# Altium PCB team back ECU.PcbDoc
Units mil, origin at the board's own origin, x right, y up, seen from the top; angles counter-clockwise.
Board outline 2850 x 2555.03 mil, 2 copper layers (Top, Bottom); 12 components, 18 nets, 110 pads, 0 vias.
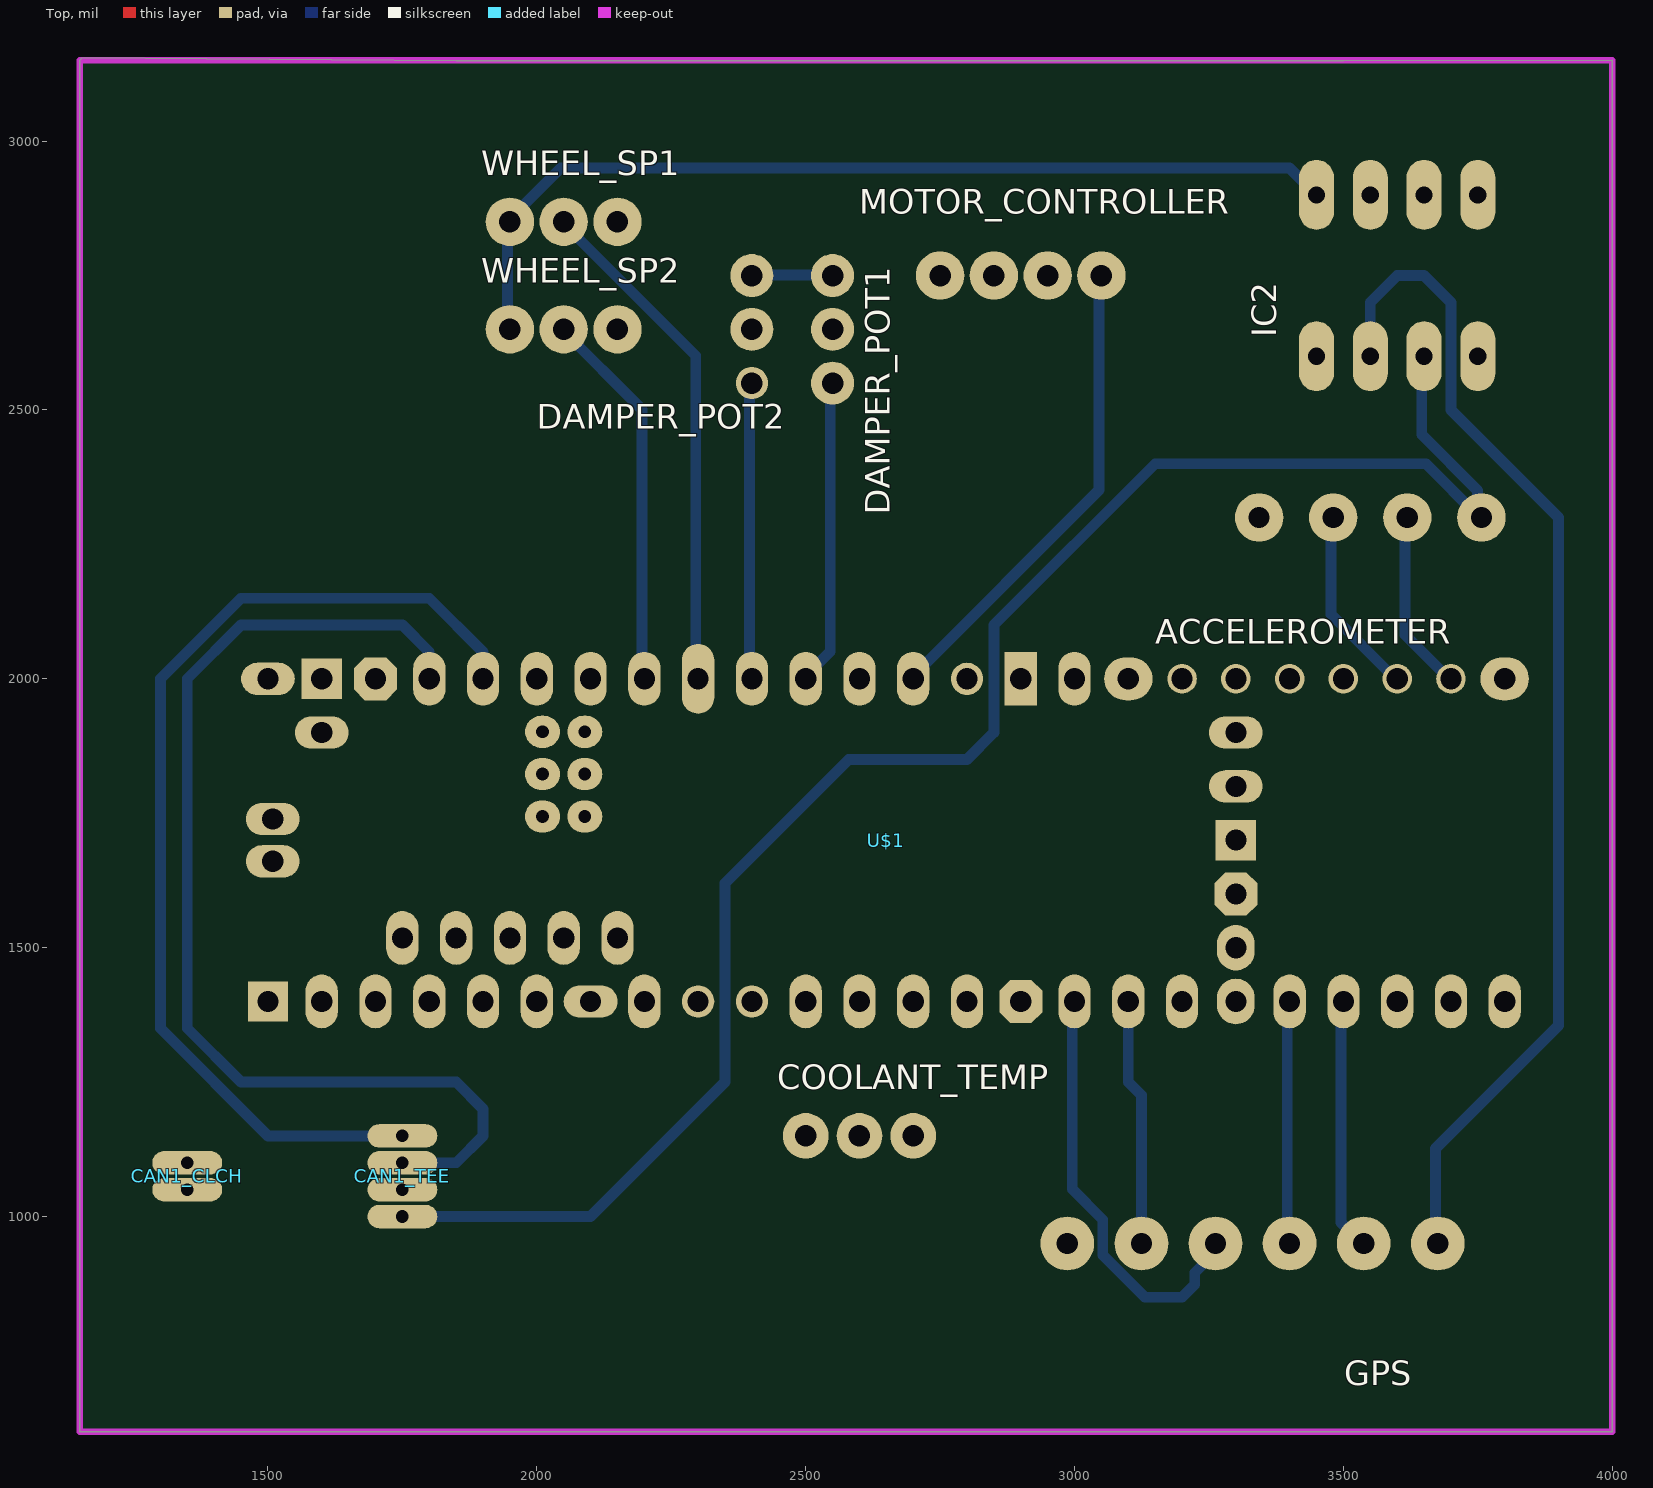
[diagram p0: Top view]
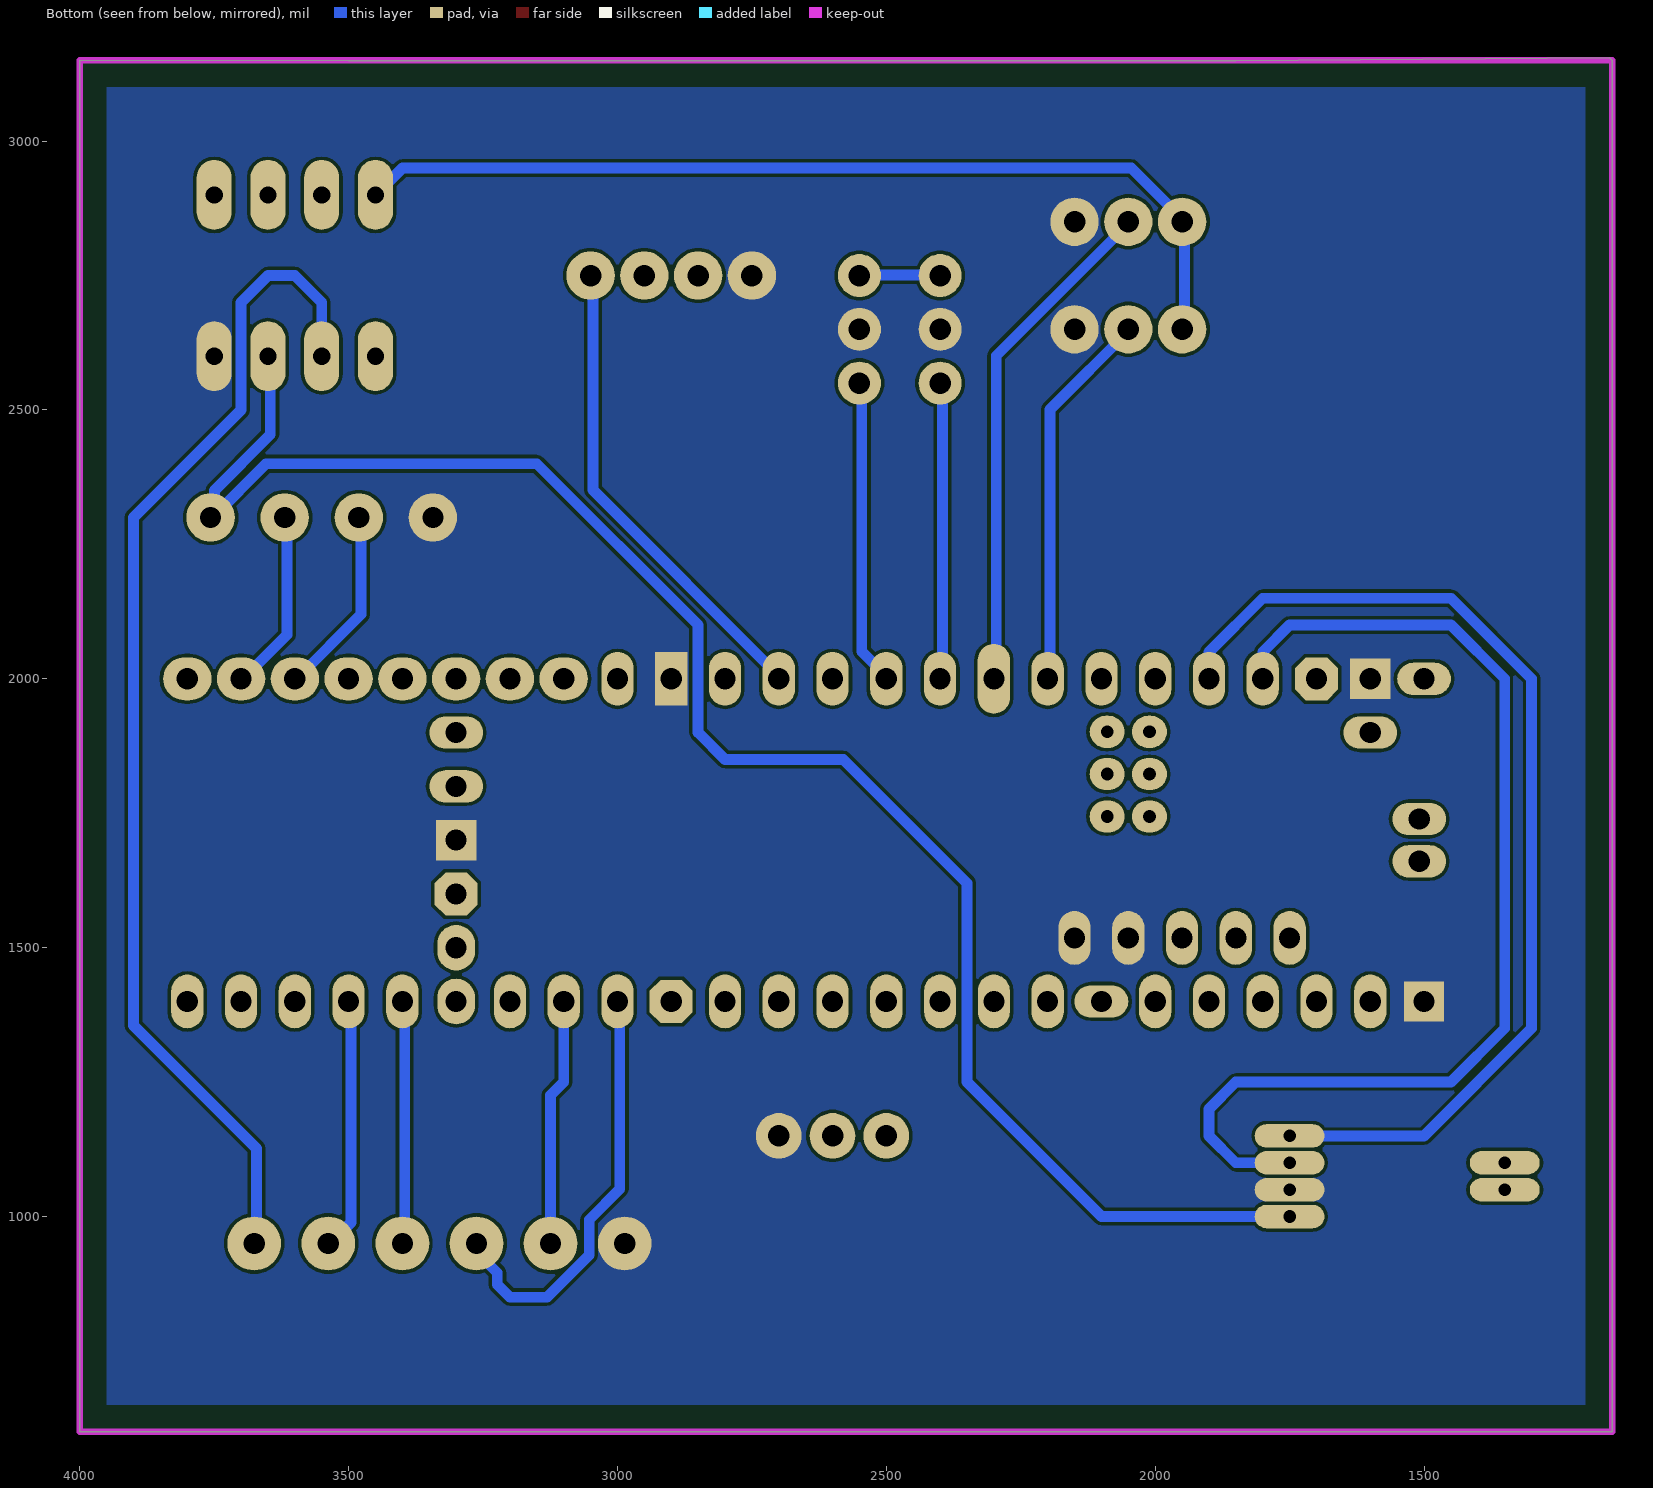
[diagram p1: Bottom view, seen from below]

## Layer stack, top to bottom
Top Solder: solder mask 0.4, Solder Resist, Dk 3.5
Top: signal copper 1.378
Dielectric 1: dielectric 12.6, FR-4, Dk 4.8
Bottom: signal copper 1.378
Bottom Solder: solder mask 0.4, Solder Resist, Dk 3.5

## Board outline
1150,600 4000,600 4000,3150 3999.74,3150.26 3500,3149.61 1850,3149.61 1155.03,3155.03 1150,3150

## Design rules (kind name [scope] priority, off if disabled: settings)
BoardOutlineClearance mdCopperDimension [All] p1: gap=10 ignorepadtopadclearanceinfootprint=FALSE except(0: Arc-SplitContinuation Track-SplitContinuation SMDPad-SplitContinuation THPad-SplitContinuation Via-SplitContinuation Fill-SplitContinuation Poly-SplitContinuation Region-SplitContinuation Text-SplitContinuation; 40: Poly-OutlineEdge Poly-CavityEdge Poly-CutoutEdge Poly-SplitBarrior)
Clearance "Clearance (Same Net)" [All] p1: gap=6 ignorepadtopadclearanceinfootprint=FALSE
Clearance [All] p2: gap=6 ignorepadtopadclearanceinfootprint=FALSE
HoleSize [All] p1: absolutevalues=TRUE maxlimit=100000 minlimit=13.78 maxpercent=80.000 minpercent=20.000
HoleToHoleClearance mdDrill [All] p1: gap=6 allowstackedmicrovias=TRUE
MinimumSolderMaskSliver [All] p1 off: minsoldermaskwidth=10
PasteMaskExpansion mlMinCreamFrame [All] p1: expansion=0
PolygonConnect PolygonConnect_For_PolygonThermal_ON_Width120000_Gap100000 [InPolygonClass('PolygonThermal_ON_Width120000_Gap100000') vs Not IsVia] p1: connectstyle=Relief reliefconductorwidth=12 reliefentries=4 polygonreliefangle="90 Angle" airgapwidth=10
PolygonConnect ThermalVias [IsVia] p2: connectstyle=Direct reliefconductorwidth=10 reliefentries=4 polygonreliefangle="90 Angle" airgapwidth=10
PolygonConnect [All] p3: connectstyle=Relief reliefconductorwidth=10 reliefentries=4 polygonreliefangle="90 Angle" airgapwidth=10
RoutingVias [All] p1: holewidth=13.78 width=29.78 viastyle="Through Hole" minholewidth=13.78 minwidth=29.78 maxholewidth=100 maxwidth=100
SolderMaskExpansion mlMinStopFrame [All] p1: expansion=4 istentingtop=FALSE
Width [All] p1: maxlimit=50 minlimit=12 preferedwidth=20 minimp=50.000000 maximp=50.000000 favimp=50.000000
26 further rules are at their usual default settings.

## Components (designator, comment, footprint, x,y, rotation, side; value= is the part's Value field where it differs from the comment)
ACCELEROMETER "" 1X04-3.5MM 3550,2300 r0 top
CAN1_CLCH "" CAN_BUS 1450,900 r90 top
CAN1_TEE "" CAN_TEN 1800,900 r90 top
COOLANT_TEMP "" 1X03#1 2600,1150 r0 top
DAMPER_POT1 "" 1X03-CLEANBIG#1 2550,2650 r270 top
DAMPER_POT2 "" 1X03-CLEANBIG#2 2400,2650 r270 top
GPS "" 1X06-3.5MM 3331.1,950 r0 top
IC2 "ICL7663CPA" DIL08 3600,2750 r0 top
MOTOR_CONTROLLER "1X4-BIG" 1X04-BIG 2750,2750 r0 top
U$1 "" TEENSY41 2700,1700 r0 top
WHEEL_SP1 "" 1X03#2 2050,2850 r0 top
WHEEL_SP2 "" 1X03#2 2050,2650 r0 top

## Footprints (in the part's own frame and the unit in brackets; to place one, negate y for a bottom-side part, rotate by r counter-clockwise, add the part's x,y. Pads: shape width x height; smd on the part's side, far side on the other; paste and mask are expansions set on the pad)
1X03#1 [mil] "1X03"
  round 85 / inner round 60 / far side round 85 hole 40: 1(-100,0) 2(0,0) 3(100,0)
1X03#2 [mil] "1X03"
  round 90 / inner round 60 / far side round 90 hole 40: 1(-100,0) 2(0,0) 3(100,0)
1X03-CLEANBIG#1 [mil] "1X03-CLEANBIG"
  round 80 / inner round 66 / far side round 80 hole 40: 1(-100,0) 2(0,0) 3(100,0)
1X03-CLEANBIG#2 [mil] "1X03-CLEANBIG"
  round 80 / inner round 66 / far side round 80 hole 40: 1(-100,0) 2(0,0)
  round 60 / inner round 66 / far side round 80 hole 40: 3(100,0)
1X04-3.5MM [mil] "1X04-3.5MM"
  round 90 / inner round 86 / far side round 90 hole 39.37: 1(-206.69,0) 2(-68.9,0) 3(68.9,0) 4(206.69,0)
1X04-BIG [mil] "1X04-BIG"
  round 90 / inner round 70 / far side round 90 hole 40: 1(0,0) 2(100,0) 3(200,0) 4(300,0)
1X06-3.5MM [mm] "1X06-3.5MM"
  round 2.54 / inner round 2.184 / far side round 2.54 hole 1: 1(-8.75,0) 2(-5.25,0) 3(-1.75,0) 4(1.75,0) 5(5.25,0) 6(8.75,0)
CAN_BUS [mil] "CAN_BUS"
  oval 43.62x130 / inner oval 43.62x87.24 / far side oval 43.62x130 hole 23.62: P$2(150,100) P$3(200,100)
CAN_TEN [mil] "CAN_TEN"
  oval 43.62x130 / inner oval 43.62x87.24 / far side oval 43.62x130 hole 23.62: P$1(100,50) P$2(150,50) P$3(200,50) P$4(250,50)
DIL08 [mil] "DIL08"
  oval 65x130 / inner oval 52x104 / far side oval 65x130 hole 32: 1(-150,-150) 2(-50,-150) 3(50,-150) 4(150,-150) 5(150,150) 6(50,150) 7(-50,150) 8(-150,150)
TEENSY41 [mil] "TEENSY41"
  oval 60x100 / inner round 59.37 / far side oval 60x100 hole 39.37: 0-RX1/CS1/CRX2(-1100,-300) 1-TX1/MISO1/CTX2(-1000,-300) 2-OUT2(-900,-300) 3-LRCLK2(-800,-300) 4-BCLK2(-700,-300) 6-OUT1D(-500,-300) 9-OUT1C(-200,-300) 10-CS\MQSR(-100,-300) 11-MOSI/CTX1(0,-300) 12-MISO/MQSL(100,-300) 14-A0/TX3/SPDIF_OUT(0,300) 15-A1/RX3/SPDIF_IN(-100,300) 16-A2/RX4/SCL1(-200,300) 17-A3/TX4/SDA1(-300,300) 19-A5/SCL0(-500,300) 20-A6/TX5/LRCLK1(-600,300) 21-A7/RX5/BCLK1(-700,300) 22-A8/CTX1(-800,300) 23-A9/CRX1/MCLK1(-900,300) 24-A10/TX6/SCL2(300,-300) 25-A11/RX6/SDA2(400,-300) 26-A12/MOSI1(500,-300) 28-RX7(700,-300) 29-TX7(800,-300) 30-CRX3(900,-300) 31-CTX3(1000,-300) 32-OUT1B(1100,-300) 41-A17/MISO1(300,300) +5V(-950,-181.89) DM(-850,-181.89) DP(-750,-181.89) GND4(-650,-181.89) GND5(-550,-181.89)
  oct 80x80 / inner round 54.85 / far side oct 80x80 hole 39.37: 3V3-1(200,-300) 3V3-2(600,-100) 3V3-3(-1000,300)
  oval 100x60 / inner round 59.37 / far side oval 100x60 hole 39.37: 5-IN2(-600,-300) D+(-1190.94,-39.37) D-(-1190.94,39.37) ON/OFF(600,200) PROGRAM(600,100) VUSB(-1100,200)
  round 60 / inner round 59.37 / far side oval 59.37x100 hole 39.37: 7-RX2/OUT1A(-400,-300) 8-TX2/IN2(-300,-300) 13-SCK/LED(100,300)
  oval 60x130 / inner round 59.37 / far side oval 60x130 hole 39.37: 18-A4/SDA0(-400,300)
  oval 70x85 / inner round 59.37 / far side oval 70x85 hole 39.37: 27-A13/SCK1(600,-300) VBAT(600,-200)
  oval 90x80 / inner round 59.37 / far side oval 90x80 hole 39.37: 33-MCLK2(1100,300) 40-A16/CS1(400,300)
  round 55 / inner round 59.37 / far side oval 90x80 hole 39.37: 34-RX8(1000,300) 35-TX8(900,300) 36-PWM(800,300) 37-PWM(700,300) 38-A14/CS/IN1(600,300) 39-A15/CS/OUT1A(500,300)
  oval 65x60 / inner round 43.62 / far side oval 65x60 hole 23.62: G(-610.63,122.83) LED(-689.37,122.83) R+(-689.37,201.57) R-(-610.63,201.57) T+(-610.63,44.09) T-(-689.37,44.09)
  rect 75x75 / inner round 54.85 / far side rect 75x75 hole 39.37: GND1(-1200,-300) GND2(600,0) GND6(-1100,300)
  rect 60x100 / inner round 54.85 / far side rect 60x100 hole 39.37: GND3(200,300)
  oval 100x60 / inner round 66 / far side oval 100x60 hole 39.37: VIN(-1200,300)

## Part data
ACCELEROMETER: library part 1X04-3.5MM, PackageName=1X04-3.5MM
CAN1_CLCH: library part CAN_BUS, PackageName=CAN_BUS
CAN1_TEE: library part CAN_TEN, PackageName=CAN_TEN
COOLANT_TEMP WHEEL_SP1 WHEEL_SP2: library part 1X03, PackageName=1X03
DAMPER_POT1 DAMPER_POT2: library part 1X03-CLEANBIG, PackageName=1X03-CLEANBIG
GPS: library part 1X06-3.5MM, PackageName=1X06-3.5MM
IC2: library part DIL08, PackageName=DIL08
MOTOR_CONTROLLER: library part 1X04-BIG, PackageName=1X04-BIG
U$1: library part TEENSY41, PackageName=TEENSY41

## Nets (pads, with @x,y where several pads share a name; then routed paths per layer and width w, separated by ;. In a path a pad name is that pad's centre, name@x,y a point inside that pad or via, vN(x,y) a via of type N, cw(c..) or ccw(c..) an arc to the next point about the centre after c; other vN are vias at no path point)
3.3V: ACCELEROMETER.4 CAN1_TEE.P$1 IC2.3 | length 3304.1
  Bottom w20: CAN1_TEE.P$1 2100,1000 2350,1250 2350,1619.95 2580.05,1850 2800,1850 2850,1900 2850,2100 3150,2400 3653.39,2400 ACCELEROMETER.4@3752.37,2301.03 ; IC2.3@3645.68,2601.03 3645.68,2454.32 3749.63,2350.37 3749.63,2307.06 ACCELEROMETER.4
5V: GPS.6 IC2.2 | length 2218
  Bottom w20: IC2.2 3550,2700 3600,2750 3650,2750 3700,2700 3700,2500 3900,2300 3900,1355.35 3671.27,1126.62 GPS.6@3671.27,951.02
12V: IC2.8 WHEEL_SP1.1 WHEEL_SP2.1 | length 1766
  Bottom w20: WHEEL_SP2.1@1945.68,2651.03 1945.68,2851.03 2044.65,2950 3400,2950 IC2.8
A2: DAMPER_POT1.3 U$1.16-A2/RX4/SCL1 | length 570.7
  Bottom w20: U$1.16-A2/RX4/SCL1@2495.68,2001.03 2545.68,2051.03 DAMPER_POT1.3@2545.68,2551.03
A3: DAMPER_POT2.3 U$1.17-A3/TX4/SDA1 | length 550
  Bottom w20: U$1.17-A3/TX4/SDA1@2395.68,2001.03 DAMPER_POT2.3@2395.68,2551.03
A_MC: MOTOR_CONTROLLER.4 U$1.14-A0/TX3/SPDIF_OUT | length 895
  Bottom w20: U$1.14-A0/TX3/SPDIF_OUT@2695.68,2001.03 3045.68,2351.03 MOTOR_CONTROLLER.4@3045.68,2751.03
BR_VCC: DAMPER_POT1.1 DAMPER_POT2.1 | length 150
  Bottom w20: DAMPER_POT2.1@2395.68,2751.03 DAMPER_POT1.1@2545.68,2751.03
GND: ACCELEROMETER.1 CAN1_TEE.P$2 COOLANT_TEMP.3 DAMPER_POT1.2 DAMPER_POT2.2 GPS.1 IC2.4 MOTOR_CONTROLLER.1 U$1.GND1 U$1.GND2 U$1.GND3 U$1.GND4 U$1.GND5 U$1.GND6 WHEEL_SP1.3 WHEEL_SP2.3
N$2: CAN1_TEE.P$3 U$1.23-A9/CRX1/MCLK1 | length 2045
  Bottom w20: CAN1_TEE.P$3 1850,1100 1900,1150 1900,1200 1850,1250 1450,1250 1350,1350 1350,2000 1450,2100 1750,2100 1800,2050 U$1.23-A9/CRX1/MCLK1
N$3: CAN1_TEE.P$4 U$1.22-A8/CTX1 | length 1936.4
  Bottom w20: CAN1_TEE.P$4 1500,1150 1300,1350 1300,2000 1450,2150 1800,2150 1900,2050 U$1.22-A8/CTX1
RX: ACCELEROMETER.2 U$1.35-TX8 | length 349.2
  Bottom w20: ACCELEROMETER.2@3476.78,2301.03 3476.78,2119.93 U$1.35-TX8@3595.68,2001.03
RX_2: GPS.5 U$1.29-TX7 | length 465.7
  Bottom w20: U$1.29-TX7@3495.68,1401.03 3495.68,988.82 GPS.5@3533.47,951.02
SCL: GPS.3 U$1.24-A10/TX6/SCL2 | length 801.8
  Bottom w20: U$1.24-A10/TX6/SCL2@2995.68,1401.03 2995.68,1051.03 3052.61,994.1 3052.61,928.46 3131.07,850 3200,850 3223.45,873.45 3223.45,895.42 3262.2,934.17 GPS.3
SDA: GPS.2 U$1.25-A11/RX6/SDA2 | length 460.1
  Bottom w20: U$1.25-A11/RX6/SDA2 3100,1250 3124.41,1225.59 GPS.2
TX: ACCELEROMETER.3 U$1.34-RX8 | length 333.6
  Bottom w20: ACCELEROMETER.3@3614.58,2301.03 3614.58,2082.12 U$1.34-RX8@3695.68,2001.03
TX_2: GPS.4 U$1.28-RX7 | length 450
  Bottom w20: GPS.4@3395.68,951.02 U$1.28-RX7@3395.68,1401.03
WH_SP1_D: U$1.18-A4/SDA0 WHEEL_SP1.2 | length 953.6
  Bottom w20: WHEEL_SP1.2@2045.68,2851.03 2295.68,2601.03 U$1.18-A4/SDA0@2295.68,2001.03
WH_SP2_D: U$1.19-A5/SCL0 WHEEL_SP2.2 | length 712.1
  Bottom w20: WHEEL_SP2.2@2045.68,2651.03 2195.68,2501.03 U$1.19-A5/SCL0@2195.68,2001.03
pads on no net: CAN1_CLCH.P$2 CAN1_CLCH.P$3 COOLANT_TEMP.1 COOLANT_TEMP.2 IC2.1 IC2.5 IC2.6 IC2.7 MOTOR_CONTROLLER.2 MOTOR_CONTROLLER.3 U$1.0-RX1/CS1/CRX2 U$1.1-TX1/MISO1/CTX2 U$1.2-OUT2 U$1.3-LRCLK2 U$1.3V3-1 U$1.3V3-2 U$1.3V3-3 U$1.4-BCLK2 U$1.5-IN2 U$1.6-OUT1D U$1.7-RX2/OUT1A U$1.8-TX2/IN2 U$1.9-OUT1C U$1.10-CS\MQSR U$1.11-MOSI/CTX1 U$1.12-MISO/MQSL U$1.13-SCK/LED U$1.15-A1/RX3/SPDIF_IN U$1.20-A6/TX5/LRCLK1 U$1.21-A7/RX5/BCLK1 U$1.26-A12/MOSI1 U$1.27-A13/SCK1 U$1.30-CRX3 U$1.31-CTX3 U$1.32-OUT1B U$1.33-MCLK2 U$1.36-PWM U$1.37-PWM U$1.38-A14/CS/IN1 U$1.39-A15/CS/OUT1A U$1.40-A16/CS1 U$1.41-A17/MISO1 U$1.+5V U$1.D+ U$1.D- U$1.DM U$1.DP U$1.G U$1.LED U$1.ON/OFF U$1.PROGRAM U$1.R+ U$1.R- U$1.T+ U$1.T- U$1.VBAT U$1.VIN U$1.VUSB

## Polygon pours and split planes (outlines as drawn)
GND on Bottom "GND_L02_P000" (solid, pour order 0): 3950,3100 3950,650 1200,650 1200,3100

## Keep-outs
Keep-Out Layer:
  lines w12: 1150,600 4000,600 4000,3150 1150,3150 1150,600

## Silkscreen, mask and mechanical layers (free items; w line width, h text height)
Dimension:
  lines w20: 1879.93,601.02 3248.44,601.02 ; 1900,600 1150,600 1150,3150 4000,3150 ; 3250,600 4000,600 4000,3150 ; 4000,3150 4000,3150

## Text inside footprints (layer, text, board x,y; h text height)
U$1: tPlace "POGO" at 1570.78,1653.76 h37.2 r90; tPlace "COIN CEL" at 3110,1483 h37.2; tPlace "3 VOLT" at 3145,1510 h37.2; tPlace "USB" at 1609.89,1655.74 h49.6 r90; tPlace "TEENSY 4.1" at 2400,1700 h77.5